# EAGLE board SNARFBASE-v03i5 (EAGLE 5.11)
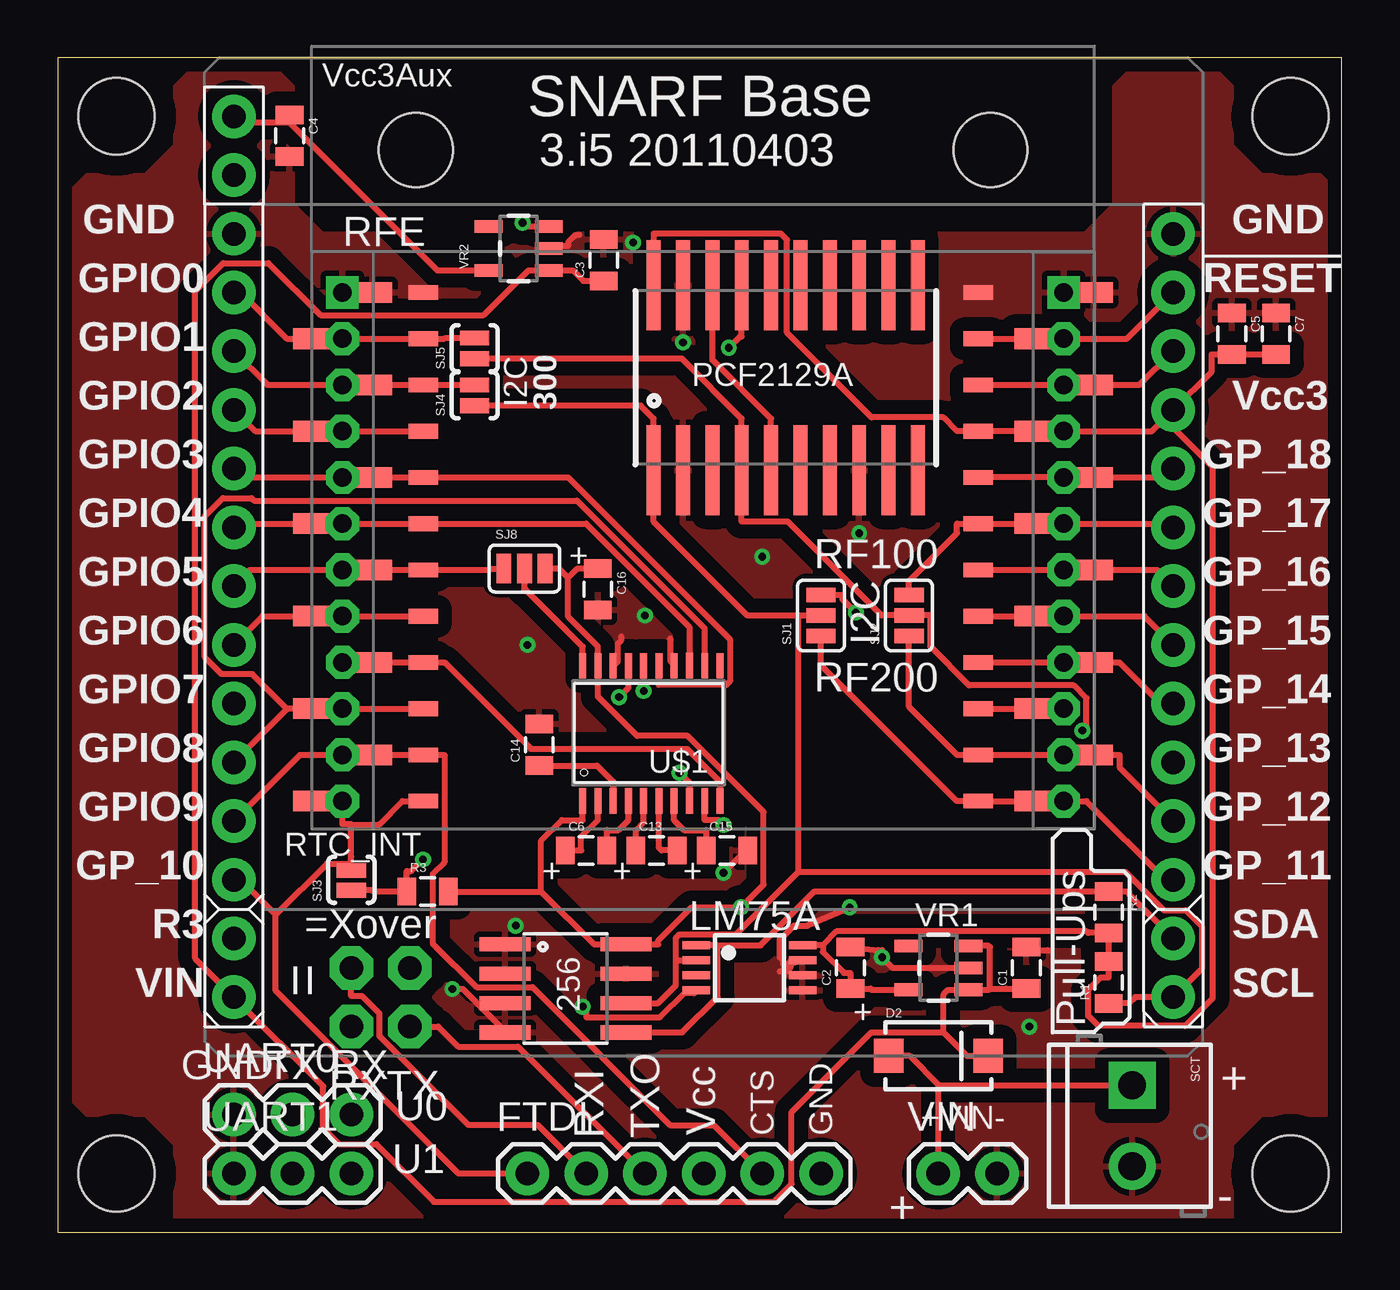
[diagram p0: board, top side]
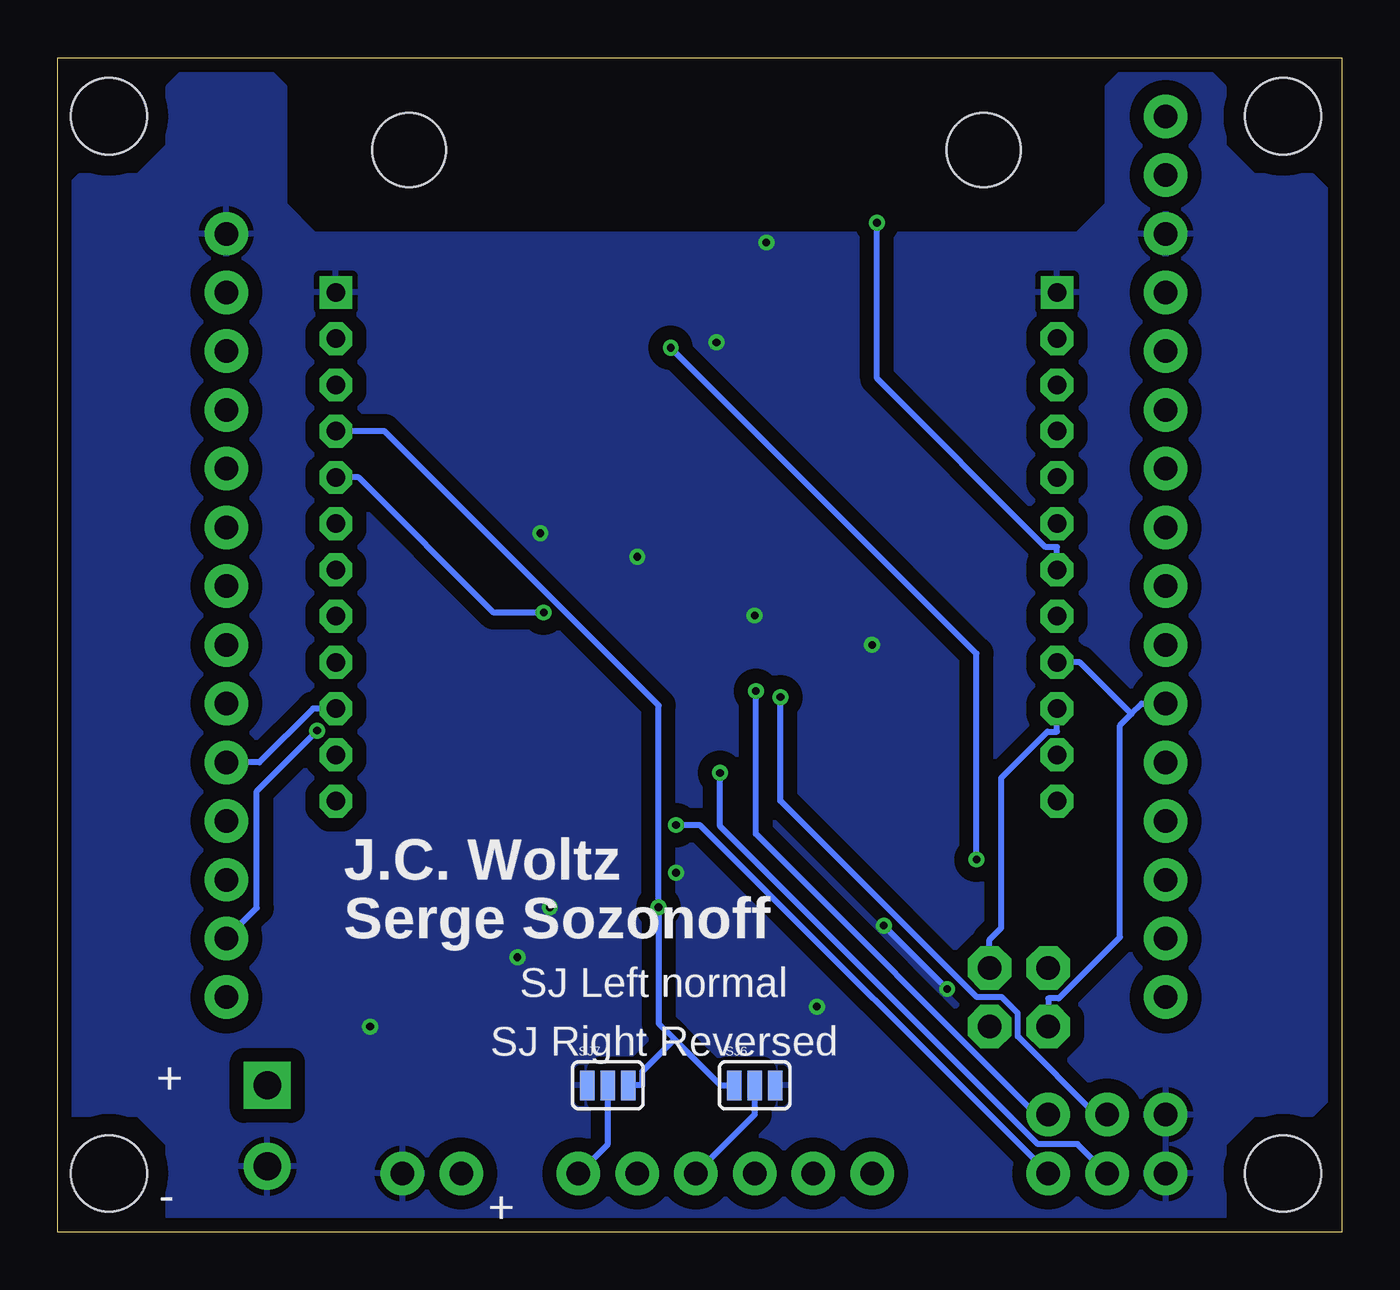
[diagram p1: board, bottom side, seen from below]

Size 55.55 x 50.79 mm. Coordinates in mm from the lower left corner, seen from the top.
Outline: 0,0 55.55,0 55.55,50.79 0,50.79 0,0
Copper layers (1*16): Top 0.0356mm / dielectric 1.5011mm / Bottom 0.0356mm
Design rules "LaenPCBOrder-JCModified": minimum track width 6mil, minimum drill 13mil, track to track 6mil, track to pad 6mil, pad to pad 6mil, via to via 6mil, smd to smd 6mil, copper to edge 15mil, drill to drill 6mil, minimum pad ring 12mil, minimum via ring 7mil, stop-mask expansion 4mil, vias tented up to drill 25mil, thermal gap 10mil
Net classes: 0 default: width 0.254 mm; 1 Power: width 0.508 mm; 2 smallsignal: width 0.152 mm; 3 stdsignal: width 0.254 mm

## Footprints (pad centres in the part's own frame; a part is rotated, then mirrored left to right if it is on the bottom)
SO08 = smd 0.61 x 2.21: 1 -1.905,-2.616; 2 -0.635,-2.616; 3 0.635,-2.616; 4 1.905,-2.616; 5 1.905,2.616; 6 0.635,2.616; 7 -0.635,2.616; 8 -1.905,2.616
SYNSJ-STACK = drill 1.016 pad 1.88 round: G0 0,-7.62; G1 0,-10.16; G2 0,-12.7; G3 0,-15.24; G4 0,-17.78; G5 0,-20.32; G6 0,-22.86; G7 0,-25.4; G8 0,-27.94; G9 0,-30.48; G10 0,-33.02; G11 40.64,-33.02; G12 40.64,-30.48; G13 40.64,-27.94; G14 40.64,-25.4; G15 40.64,-22.86; G16 40.64,-20.32; G17 40.64,-17.78; G18 40.64,-15.24; GND 0,-5.08; GND1 40.64,-5.08; R1 0,0; R2 0,-2.54; R3 0,-35.56; R4 0,-38.1; R5 40.64,-38.1; R6 40.64,-35.56; RESERVED 40.64,-10.16; RESET 40.64,-7.62; VCC 40.64,-12.7
0805 = smd 0.8 x 1.2: 1 -0.9,0; 2 0.9,0
SMA-DIODE = smd 1.27 x 1.47: A -2.15,0; C 2.15,0
1X06 = drill 1.016 pad 1.88 round: 1 0,0; 2 2.54,0; 3 5.08,0; 4 7.62,0; 5 10.16,0; 6 12.7,0
STAND-OFF = hole 3.302: 0,0
TSSOP8-3MM = smd 1.2 x 0.35: 1 -2.6,0.975; 2 -2.6,0.325; 3 -2.6,-0.325; 4 -2.6,-0.975; 5 2,-0.975; 6 2,-0.325; 7 2,0.325; 8 2,0.975
SO20W = smd 0.6 x 3.9: P$1 -5.715,-4; P$2 -4.445,-4; P$3 -3.175,-4; P$4 -1.905,-4; P$5 -0.635,-4; P$6 0.635,-4; P$7 1.905,-4; P$8 3.175,-4; P$9 4.445,-4; P$10 5.715,-4; P$11 5.715,4; P$12 4.445,4; P$13 3.175,4; P$14 1.905,4; P$15 0.635,4; P$16 -0.635,4; P$17 -1.905,4; P$18 -3.175,4; P$19 -4.445,4; P$20 -5.715,4
SYNAPSERFENGINE-THM-SMT-JACK2 = drill 0.8 square: 1 0,0; 24 31.2,0 | drill 0.8 pad 1.422 octagon: 2 0,-2; 3 0,-4; 4 0,-6; 5 0,-8; 6 0,-10; 7 0,-12; 8 0,-14; 9 0,-16; 10 0,-18; 11 0,-20; 12 0,-22; 13 31.2,-22; 14 31.2,-20; 15 31.2,-18; 16 31.2,-16; 17 31.2,-14; 18 31.2,-12; 19 31.2,-10; 20 31.2,-8; 21 31.2,-6; 22 31.2,-4; 23 31.2,-2 | smd 1.67 x 0.89: P1 1.3,0; P2 -1.3,-2; P3 1.3,-4; P4 -1.3,-6; P5 1.3,-8; P6 -1.3,-10; P7 1.3,-12; P8 -1.3,-14; P9 1.3,-16; P10 -1.3,-18; P11 1.3,-20; P12 -1.3,-22; P13 29.9,-22; P14 32.5,-20; P15 29.9,-18; P16 32.5,-16; P17 29.9,-14; P18 32.5,-12; P19 29.9,-10; P20 32.5,-8; P21 29.9,-6; P22 32.5,-4; P23 29.9,-2; P24 32.5,0 | smd 1.27 x 0.635: P201 3.5,0; P202 3.5,-2; P203 3.5,-4; P204 3.5,-6; P205 3.5,-8; P206 3.5,-10; P207 3.5,-12; P208 3.5,-14; P209 3.5,-16; P210 3.5,-18; P211 3.5,-20; P212 3.5,-22; P213 27.5,-22; P214 27.5,-20; P215 27.5,-18; P216 27.5,-16; P217 27.5,-14; P218 27.5,-12; P219 27.5,-10; P220 27.5,-8; P221 27.5,-6; P222 27.5,-4; P223 27.5,-2; P224 27.5,0 | hole 3.2: 3.17,6.16; 28.03,6.16
2X02_PTH = drill 1.016 pad 1.88 octagon: 1 -1.27,-1.27; 2 -1.27,1.27; 3 1.27,-1.27; 4 1.27,1.27
SCREWTERMINAL-3.5MM-2 = drill 1.2 pad 2.032 square: 1 0,0 | drill 1.2 pad 2.032 round: 2 3.5,0
SJ_3 = smd 0.635 x 1.27: 1 -0.889,0; 2 0,0; 3 0.889,0
SJ_2S-NOTRACE = smd 0.635 x 1.27: 1 -0.45,0; 2 0.4,0
SJ_2S-NO = smd 0.635 x 1.27: 1 -0.45,0; 2 0.45,0
SJ_3_PASTE1&2 = smd 0.635 x 1.27: 1 -0.889,0; 2 0,0; 3 0.889,0
TSSOP20-JC = smd 1.1 x 0.3: 1 -2.937,2.693; 2 -2.937,2.032; 3 -2.937,1.372; 4 -2.937,0.712; 5 -2.937,0.051; 6 -2.937,-0.609; 7 -2.937,-1.27; 8 -2.943,-1.93; 9 -2.937,-2.59; 10 -2.937,-3.251; 11 2.905,-3.251; 12 2.905,-2.59; 13 2.911,-1.93; 14 2.905,-1.27; 15 2.905,-0.609; 16 2.905,0.051; 17 2.905,0.712; 18 2.905,1.372; 19 2.905,2.032; 20 2.905,2.693
1X03 = drill 1.016 pad 1.88 round: 1 0,0; 2 2.54,0; 3 5.08,0
1X02 = drill 1.016 pad 1.88 round: 1 0,0; 2 2.54,0
SOT23-5 = smd 0.55 x 1.2: 1 -0.95,-1.3; 2 0,-1.3; 3 0.95,-1.3; 4 0.95,1.3; 5 -0.95,1.3

## Placement (x,y rotation side)
256  24LC256T-I/SN  [SO08]  21.97,10.54 270 top
ADDON  SYNAPSE-SJ-STCKINGD30-1600  [SYNSJ-STACK]  7.62,48.26 0 top
C1  1uF  [0805]  41.91,11.43 90 top
C2  1uF  [0805]  34.29,11.43 90 top
C3  1uF  [0805]  23.62,42.04 90 top
C4  1uF  [0805]  10.03,47.42 270 top
C5  1uF  [0805]  50.8,38.86 270 top
C6  0.1uF  [0805]  22.86,16.51 0 top
C7  10uF  [0805]  52.7,38.86 270 top
C13  0.1uF  [0805]  25.91,16.51 0 top
C14  0.1uF  [0805]  20.83,21.08 90 top
C15  0.1uF  [0805]  28.96,16.51 0 top
C16  0.1uF  [0805]  23.37,27.81 270 top
D2  [SMA-DIODE]  38.1,7.62 0 top
FTDI  [1X06]  20.32,2.54 0 top
JP6  STAND-OFF  [STAND-OFF]  53.34,2.54 0 top
JP9  STAND-OFF  [STAND-OFF]  2.54,2.54 0 top
JP10  STAND-OFF  [STAND-OFF]  53.34,48.26 0 top
JP11  STAND-OFF  [STAND-OFF]  2.54,48.26 0 top
LM75A  LM75AJC-TEST  [TSSOP8-3MM]  30.23,11.43 0 top
PCF2129A  PCF2129ASO20  [SO20W]  31.5,36.96 0 top
R1  [0805]  45.47,10.79 90 top
R2  [0805]  45.47,13.84 270 top
R3  [0805]  16,14.73 0 top
RFE  RFE  [SYNAPSERFENGINE-THM-SMT-JACK2]  12.32,40.64 0 top
RXTX  SERIAL_CROSSOVER  [2X02_PTH]  13.97,10.16 180 top
SCT  [SCREWTERMINAL-3.5MM-2]  46.48,6.35 270 top
SJ1  [SJ_3]  33.02,26.67 90 top
SJ2  [SJ_3]  36.83,26.67 90 top
SJ3  SOLDERJUMPERNC2  [SJ_2S-NOTRACE]  12.7,15.24 90 top
SJ4  SOLDERJUMPERNO  [SJ_2S-NO]  18.03,36.2 90 top
SJ5  SOLDERJUMPERNO  [SJ_2S-NO]  18.03,38.23 90 top
SJ6  [SJ_3_PASTE1&2]  25.4,6.35 0 bottom
SJ7  [SJ_3_PASTE1&2]  31.75,6.35 0 bottom
SJ8  [SJ_3_PASTE1&2]  20.19,28.7 0 top
U$1  ICL3223JC  [TSSOP20-JC]  25.4,21.59 90 top
UART0  [1X03]  7.62,5.08 0 top
UART1  [1X03]  7.62,2.54 0 top
VIN  [1X02]  38.1,2.54 0 top
VR1  MCP1802  [SOT23-5]  38.1,11.43 90 top
VR2  MCP1802  [SOT23-5]  19.94,42.55 90 top

## Library data of the parts
256 D2 FTDI JP6 JP9-JP11 R1-R3 SCT SJ1-SJ8 UART0 UART1 VIN = SparkFun
ADDON C1-C7 C13-C16 LM75A PCF2129A RFE RXTX U$1 VR1 VR2 = 0_jc-custom

## Nets
!FORCEOFF: SJ8.2 U$1.20
!INVALID: U$1.11
FTDI_GND: FTDI.6 SJ7.2
FTDI_VCC: FTDI.4 SJ6.2
GND: 256.1 256.2 256.3 256.4 256.7 ADDON.GND ADDON.GND1 C1.2 C2.2 C3.2 C4.2 C5.1 C7.1 C14.2 C15.2 C16.2 LM75A.4 LM75A.5 LM75A.6 LM75A.7 PCF2129A.P$2 PCF2129A.P$8 PCF2129A.P$19 RFE.1 RFE.24 RFE.P1 RFE.P24 RFE.P201 RFE.P224 SCT.2 SJ6.3 SJ7.1 U$1.14 U$1.18 UART0.1 UART1.1 VIN.2 VR1.2 VR2.2
GPIO0: ADDON.G0 RFE.2 RFE.P2 RFE.P202 SJ5.2
GPIO1: ADDON.G1 RFE.3 RFE.P3 RFE.P203 SJ4.2
GPIO2: ADDON.G2 RFE.4 RFE.P4 RFE.P204
GPIO3: ADDON.G3 RFE.5 RFE.P5 RFE.P205 U$1.15
GPIO4: ADDON.G4 RFE.6 RFE.P6 RFE.P206 U$1.13
GPIO5: ADDON.G5 RFE.7 RFE.P7 RFE.P207 SJ8.1 VR2.3
GPIO6: ADDON.G6 RFE.8 RFE.P8 RFE.P208
GPIO7: ADDON.G7 RFE.9 RFE.P9 RFE.P209 RXTX.4 U$1.10
GPIO8: ADDON.G8 RFE.10 RFE.P10 RFE.P210 RXTX.1 U$1.12
GPIO9: ADDON.G9 FTDI.5 RFE.11 RFE.P11 RFE.P211
GPIO10: ADDON.G10 FTDI.1 RFE.12 RFE.P12 RFE.P212 SJ3.2
GPIO11: ADDON.G11 RFE.13 RFE.P13 RFE.P213 SJ1.1
GPIO12: ADDON.G12 RFE.14 RFE.P14 RFE.P214 SJ2.1
GPIO13: ADDON.G13 RFE.15 RFE.P15 RFE.P215
GPIO14: ADDON.G14 RFE.16 RFE.P16 RFE.P216
GPIO15: ADDON.G15 RFE.17 RFE.P17 RFE.P217
GPIO16: ADDON.G16 RFE.18 RFE.P18 RFE.P218
GPIO17: ADDON.G17 RFE.19 RFE.P19 RFE.P219 SJ2.3
GPIO18: ADDON.G18 RFE.20 RFE.P20 RFE.P220 SJ1.3
GPIO19: ADDON.RESERVED RFE.22 RFE.P22 RFE.P222
IFS: PCF2129A.P$5 PCF2129A.P$18
N$1: C13.1 U$1.5
N$2: C13.2 U$1.6
N$3: C6.1 U$1.2
N$5: C6.2 U$1.4
N$9: C14.1 U$1.3
N$10: C15.1 U$1.7
N$11: LM75A.3
N$12: ADDON.R2
N$16: ADDON.R3
R6: PCF2129A.P$17 R3.1 SJ3.1
RESET_L: ADDON.RESET RFE.23 RFE.P23 RFE.P223
RX0: U$1.16 UART0.3
RX1: U$1.9 UART1.3
RXI: FTDI.2 RXTX.3
SCL: 256.6 ADDON.R5 LM75A.2 PCF2129A.P$1 R1.1 SJ1.2 SJ4.1
SDA: 256.5 ADDON.R6 LM75A.1 PCF2129A.P$4 R2.1 SJ2.2 SJ5.1
TX0: U$1.17 UART0.2
TX1: U$1.8 UART1.2
TXO: FTDI.3 RXTX.2
VCC3: 256.8 ADDON.VCC C2.1 C5.2 C7.2 C16.1 LM75A.8 PCF2129A.P$20 R1.2 R2.2 R3.2 RFE.21 RFE.P21 RFE.P221 SJ6.1 SJ7.3 SJ8.3 U$1.1 U$1.19 VR1.5
VCC3A: ADDON.R1 C4.1 VR2.5
VIN: ADDON.R4 C1.1 C3.1 D2.C VR1.1 VR1.3 VR2.1
VIN_PREDIODE: D2.A SCT.1 VIN.1

## Tracks (layer width: path | path; a pad name or v marks a point on that pad's centre or on a via)
!FORCEOFF
  Top 0.254: SJ8.2 20.19,27.79 20.24,27.79 22.71,25.32 U$1.20
FTDI_GND
  Bottom 0.254: SJ7.2 31.75,3.81 FTDI.6
FTDI_VCC
  Bottom 0.254: SJ6.2 25.4,5.08 FTDI.4
GND  (via drill 0.33, 0.33 pad 0.61)
  Top 0.254: LM75A.4 27.58,10.36 27.13,10.36 26.06,9.3 22.86,9.3 22.86,9.6 22.77,9.6 | 31.7,11.58 31.7,11.43 31.55,11.28 31.24,11.28 | 31.7,11.58 31.7,11.73 32.16,11.73 LM75A.7 31.7,11.58 | 31.7,11.58 31.39,11.58 31.39,11.73 31.24,11.89 31.24,12.65 31.85,13.26 32.46,13.26 32.48,13.29 v34.27,14.05 | 22.55,43.13 22.4,43.13 22.1,42.82 22.1,42.67 21.34,42.67 VR2.2 | 24.38,25.76 24.38,25.6 24.23,25.45 24.23,24.69 24.08,24.54 U$1.18 | U$1.14 26.67,24.54 26.52,24.69 26.52,25.6 26.49,25.68 | v28.8,15.54 29.72,16.46 C15.2 | C1.2 41.91,12.19 42.82,12.19 42.87,12.17 | 24.77,42.67 24.84,42.67 v24.89,42.8 | 35.51,12.19 35.66,12.19 v35.66,11.89 36.12,11.43 VR1.2 | 35.51,12.19 35.49,12.19 | v17.07,10.52 17.53,10.52 19.2,8.84 256.4 | C2.2 35.51,12.19
  Bottom 0.254: v28.8,15.54 28.72,15.54 | v17.07,10.52 v19.81,13.26
  other vias: 20.32,25.4 25.4,26.67 30.48,29.21 34.67,30.23 27.05,38.48 22.71,9.75 42.04,8.89
  pour Top (isolate 0.61): 0,44.45 0,6.35 1.27,5.08 3.81,5.08 5.08,3.81 5.08,0 50.8,0 50.8,3.81 52.07,5.08 55.88,5.08 55.88,44.45 54.61,45.72 52.07,45.72 50.8,46.99 50.8,49.53 49.53,50.8 46.99,50.8 45.72,49.53 45.72,44.45 44.45,43.18 11.43,43.18 10.16,44.45 10.16,49.53 8.89,50.8 6.35,50.8 5.08,49.53 5.08,46.99 3.81,45.72 1.27,45.72
  pour Bottom (isolate 0.61): 0,44.45 0,6.35 1.27,5.08 3.81,5.08 5.08,3.81 5.08,0 50.8,0 50.8,3.81 52.07,5.08 55.88,5.08 55.88,44.45 54.61,45.72 52.07,45.72 50.8,46.99 50.8,49.53 49.53,50.8 46.99,50.8 45.72,49.53 45.72,44.45 44.45,43.18 11.43,43.18 10.16,44.45 10.16,49.53 8.89,50.8 6.35,50.8 5.08,49.53 5.08,46.99 3.81,45.72 1.27,45.72
GPIO0
  Top 0.254: SJ5.2 16.77,38.68 16.73,38.64 RFE.P202 RFE.2 RFE.P2 9.9,38.64 7.9,40.64 ADDON.G0
GPIO1
  Top 0.254: SJ4.2 16.74,36.65 16.73,36.64 RFE.P203 RFE.P3 RFE.3 9.08,36.64 ADDON.G1
GPIO2
  Top 0.254: ADDON.G2 8.54,34.64 RFE.P4 RFE.4 RFE.P204
GPIO3
  Top 0.254: U$1.15 26.01,23.67 28.92,23.67 29.08,23.82 29.08,25.64 22.09,32.64 RFE.P205 RFE.P5 RFE.5 8,32.64 ADDON.G3
GPIO4
  Top 0.254: U$1.13 27.33,26.17 22.86,30.64 RFE.P206 RFE.6 RFE.P6 7.78,30.64 ADDON.G4
GPIO5  (via drill 0.33 pad 0.69)
  Top 0.254: ADDON.G5 8.32,28.64 RFE.7 RFE.P7 RFE.P207 18.64,28.64 18.71,28.7 SJ8.1 | VR2.3 20.36,43.49 20.2,43.66 v20.11,43.66
  Bottom 0.254: RFE.7 12.32,29.63 12.81,29.63 20.11,36.92 v20.11,43.66
GPIO6
  Top 0.254: ADDON.G6 8.86,26.64 RFE.P8 RFE.8 RFE.P208
GPIO7
  Top 0.254: U$1.10 28.65,19.48 27.23,20.91 20.47,20.91 16.73,24.64 RFE.P209 RFE.P9 RFE.9
  Bottom 0.254: 9.1,22.41 8.65,22.86 ADDON.G7 | 9.1,22.41 9.6,21.92 9.6,12.76 12.24,10.11 12.7,10.11 RXTX.4 | 9.1,22.41 11.33,24.64 RFE.9
GPIO8
  Top 0.254: U$1.12 27.99,26.11 22.46,31.64 8.49,31.64 8.38,31.75 7.14,31.75 6.36,30.96 6.36,24.87 7.09,24.13 8.41,24.13 9.9,22.64 | 9.9,22.64 RFE.P10 RFE.10 RFE.P210 | 9.9,22.64 9.9,22.61 ADDON.G8
  Bottom 0.254: RFE.10 12.32,21.65 12.73,21.65 14.73,19.64 14.73,13.15 15.24,12.65 RXTX.1
GPIO9
  Top 0.254: FTDI.5 28.39,4.63 26.5,4.63 20.53,10.59 18.11,10.59 16.22,12.48 16.22,15.49 16.73,16 16.73,20.64 RFE.P211 RFE.P11 RFE.11 10.48,20.64 ADDON.G9
GPIO10
  Top 0.254: 9.43,13.72 7.91,15.24 ADDON.G10 | FTDI.1 17.32,2.54 9.43,10.43 9.43,13.72 | 12.7,15.94 11.65,15.94 9.43,13.72 | 12.7,15.94 12.7,16.24 12.7,17.63 | 12.7,15.94 SJ3.2 | 12.7,17.63 13.89,17.63 14.9,18.64 RFE.P212 | 12.7,17.63 12.68,17.65 12.32,17.65 RFE.12 RFE.P12
GPIO11
  Top 0.254: ADDON.G11 47.91,15.24 44.51,18.64 RFE.13 RFE.P13 RFE.P213 38.9,18.64 33.02,24.52 33.02,25.18 SJ1.1
GPIO12
  Top 0.254: ADDON.G12 45.93,20.11 45.93,20.64 RFE.P14 RFE.14 RFE.P214 38.9,20.64 36.83,22.71 SJ2.1
GPIO13
  Top 0.254: RFE.15 RFE.P15 RFE.P215
  Bottom 0.254: RFE.15 44.51,22.64 46.83,20.32 ADDON.G13
GPIO14
  Top 0.254: ADDON.G14 47.71,22.86 45.93,24.64 RFE.P16 RFE.16 RFE.P216
GPIO15
  Top 0.254: ADDON.G15 47.02,26.64 RFE.17 RFE.P17 RFE.P217
GPIO16
  Top 0.254: ADDON.G16 47.56,28.64 RFE.P18 RFE.18 RFE.P218
GPIO17
  Top 0.254: SJ2.3 36.83,28.16 38.9,30.23 38.9,30.64 RFE.P219 RFE.P19 RFE.19 48.1,30.64 ADDON.G17
GPIO18  (via drill 0.33 pad 0.69)
  Top 0.254: SJ1.3 33.93,27.56 33.93,27.39 v34.53,26.8 | ADDON.G18 47.88,32.64 RFE.P20 RFE.20 RFE.P220
  Bottom 0.254: RFE.20 42.53,32.64 36.69,26.8 v34.53,26.8
GPIO19
  Top 0.254: ADDON.RESERVED 46.8,36.64 RFE.P22 RFE.22 RFE.P222
IFS
  Top 0.254: PCF2129A.P$5 30.86,35.19 28.32,37.73 PCF2129A.P$18
N$1
  Top 0.254: C13.1 25.01,17.39 25.35,17.73 U$1.5
N$2
  Top 0.254: C13.2 26.13,16.51 26.01,16.63 U$1.6
N$3
  Top 0.254: C6.1 22.64,16.51 22.64,17.09 23.37,17.82 U$1.2
N$5
  Top 0.254: C6.2 23.76,17.39 24.25,17.39 24.69,17.82 U$1.4
N$9
  Top 0.254: U$1.3 24.03,19.48 23.33,20.18 C14.1
N$10
  Top 0.254: C15.1 28.06,17.39 27.1,17.39 26.67,17.82 U$1.7
R6  (via drill 0.33 pad 0.69)
  Top 0.254: v15.8,16.11 15.3,15.61 15.1,15.61 R3.1 13.67,14.73 13.61,14.79 SJ3.1 | PCF2129A.P$17 29.59,38.73 29.51,38.73 v29.03,38.25
  Bottom 0.254: v29.03,38.25 15.8,25.02 v15.8,16.11
RESET_L
  Top 0.254: ADDON.RESET 46.26,38.64 RFE.23 RFE.P23 RFE.P223
RX0  (via drill 0.33 pad 0.69)
  Top 0.254: v25.35,23.4 U$1.16
  Bottom 0.254: UART0.3 13.2,5.08 25.35,17.23 v25.35,23.4
RX1  (via drill 0.33 pad 0.69)
  Top 0.254: U$1.9 27.99,17.82 28.58,17.82 v28.8,17.61
  Bottom 0.254: UART1.3 27.77,17.61 v28.8,17.61
RXI
  Top 0.254: RXTX.3 12.7,10.21 13.16,10.21 13.92,9.45 13.92,8.48 17.76,4.64 20.76,4.64 FTDI.2
SCL
  Top 0.254: 256.6 25.97,9.91 26.75,10.68 26.75,11.76 | 32.04,15.59 29.34,12.88 26.9,12.88 26.75,12.73 26.75,11.76 | 32.04,26.67 32.1,26.67 SJ1.2 | 32.04,26.67 29.84,26.67 25.78,30.73 PCF2129A.P$1 25.78,35.19 25.22,35.74 SJ4.1 | 32.04,15.59 32.04,26.67 | 32.04,15.59 46.19,15.59 47.85,13.93 48.8,13.93 49.49,13.24 49.49,11.39 ADDON.R5 46.61,10.16 46.35,9.89 R1.1 | 26.75,11.76 LM75A.2
SDA  (via drill 0.33 pad 0.69)
  Top 0.254: ADDON.R6 46.35,14.61 46.35,14.74 R2.1 32.74,14.74 30.41,12.4 28.54,12.4 | v44.33,21.69 44.51,21.87 44.51,23.09 43.95,23.65 39.43,23.65 37.74,25.33 37.74,26.67 SJ2.2 35.64,26.67 31.59,30.73 29.59,30.73 PCF2129A.P$4 29.59,35.19 27,37.78 SJ5.1 | 28.54,12.4 LM75A.1 | 28.54,12.4 28.54,10.16 27.02,8.64 256.5
  Bottom 0.254: v44.33,21.69 46.94,19.08 46.94,14.02 | 46.94,14.02 | ADDON.R6 46.94,14.02
TX0  (via drill 0.33 pad 0.69)
  Top 0.254: v24.28,23.14 24.69,23.54 U$1.17
  Bottom 0.254: UART0.2 10.64,5.08 14.02,8.46 14.02,9.47 14.71,10.16 15.79,10.16 24.28,18.65 v24.28,23.14
TX1  (via drill 0.33 pad 0.69)
  Top 0.254: U$1.8 27.33,19.48 27.28,19.48 v26.9,19.86
  Bottom 0.254: UART1.2 11.43,3.81 13.15,3.81 26.9,17.55 v26.9,19.86
TXO
  Top 0.254: RXTX.2 16.46,8.89 17.32,8.03 19.91,8.03 FTDI.3
VCC3  (via drill 0.33 pad 0.69)
  Top 0.254: 20.92,14.73 20.92,16.93 21.81,17.82 22.71,17.82 U$1.1 | PCF2129A.P$20 25.78,43.19 31.28,43.19 31.55,42.92 31.55,38.89 35.21,35.24 38.31,35.24 38.9,34.64 RFE.P221 RFE.P21 RFE.21 47.34,34.64 47.88,35.18 | 33.1,12.4 LM75A.8 | 33.1,12.4 33.1,12.12 34.01,11.21 34.29,11.21 C2.1 34.73,10.53 35.17,10.53 35.22,10.48 VR1.5 | 22.08,28.3 22.49,28.71 C16.1 | 22.08,28.3 22.08,26.61 23.37,25.32 U$1.19 23.37,23.16 25.06,21.47 27.25,21.47 30.54,18.17 30.54,15.03 v29.56,14.05 27.43,14.05 25.97,12.59 25.97,12.45 256.8 23.89,12.45 23.2,12.45 20.92,14.73 | 22.08,28.3 | 22.08,28.3 21.68,28.7 SJ8.3 | 47.88,35.18 ADDON.VCC 49.92,37.22 49.92,37.96 C5.2 C7.2 | 47.88,35.18 49.95,33.11 49.95,10.1 48.77,8.92 45.02,8.92 44.59,9.35 44.59,10.48 45.13,11.02 45.47,11.02 R1.2 R2.2 44.59,12.94 44.52,13.01 33.68,13.01 33.1,12.4 | 20.92,14.73 17.24,14.73 R3.2
  Bottom 0.254: SJ7.3 30.26,6.35 30.26,6.95 28.87,8.34 | 28.87,8.34 26.89,6.35 SJ6.1 | 28.87,8.34 29.56,9.02 v29.56,14.05 29.56,22.78 41.42,34.64 RFE.21
VCC3A
  Top 0.254: VR2.5 16.42,41.59 10.03,47.98 | 10.03,47.98 7.9,47.98 ADDON.R1 | 10.03,47.98 C4.1
VIN
  Top 0.254: 40.33,10.53 40.28,10.48 VR1.1 38.52,10.48 38.32,10.28 38.32,8.63 | 40.33,10.53 41.03,10.53 C1.1 | 40.33,10.53 40.33,12.33 40.28,12.38 VR1.3 | 38.32,8.63 39.34,7.62 D2.C | 38.32,8.63 35.19,8.63 31.75,5.19 31.75,2.08 30.98,1.31 16.28,1.31 13.78,3.81 12.17,3.81 11.48,4.5 11.48,6.3 ADDON.R4 5.95,11.83 5.95,40.7 7.16,41.91 9.11,41.91 11.37,39.66 18.42,39.66 20.36,41.59 VR2.1 22.29,41.59 22.74,41.14 C3.1
VIN_PREDIODE
  Top 0.254: 38.1,6.35 38.1,6.38 36.86,7.62 D2.A | VIN.1 38.1,6.35 | 38.1,6.35 SCT.1

## Text on the board
tPlace: Vcc3Aux | SNARF Base | 3.i5 20110403 | GND | GND | GPIO0 | !RESET | GPIO1 | GPIO2 | I2C | 300 | Vcc3 | GPIO3 | GP_18 | GPIO4 | RF100 | GP_17 | GPIO5 | + | GP_16 | GPIO6 | I2C | RF200 | GP_15 | GPIO7 | GP_14 | GPIO8 | GP_13 | GPIO9 | GP_12 | GP_10 | RTC_INT | + | + | + | GP_11 | R3 | =Xover | SDA | VIN | = | SCL | + | Pull-Ups | GND | TX | RX | + | U0 | RXI | TXO | Vcc | CTS | GND | +VIN- | U1 | - | +
bPlace: J.C. Woltz | Serge Sozonoff | SJ Left normal | SJ Right Reversed | + | - | +